# EAGLE board people_counter_v2 (EAGLE 9.6.2)
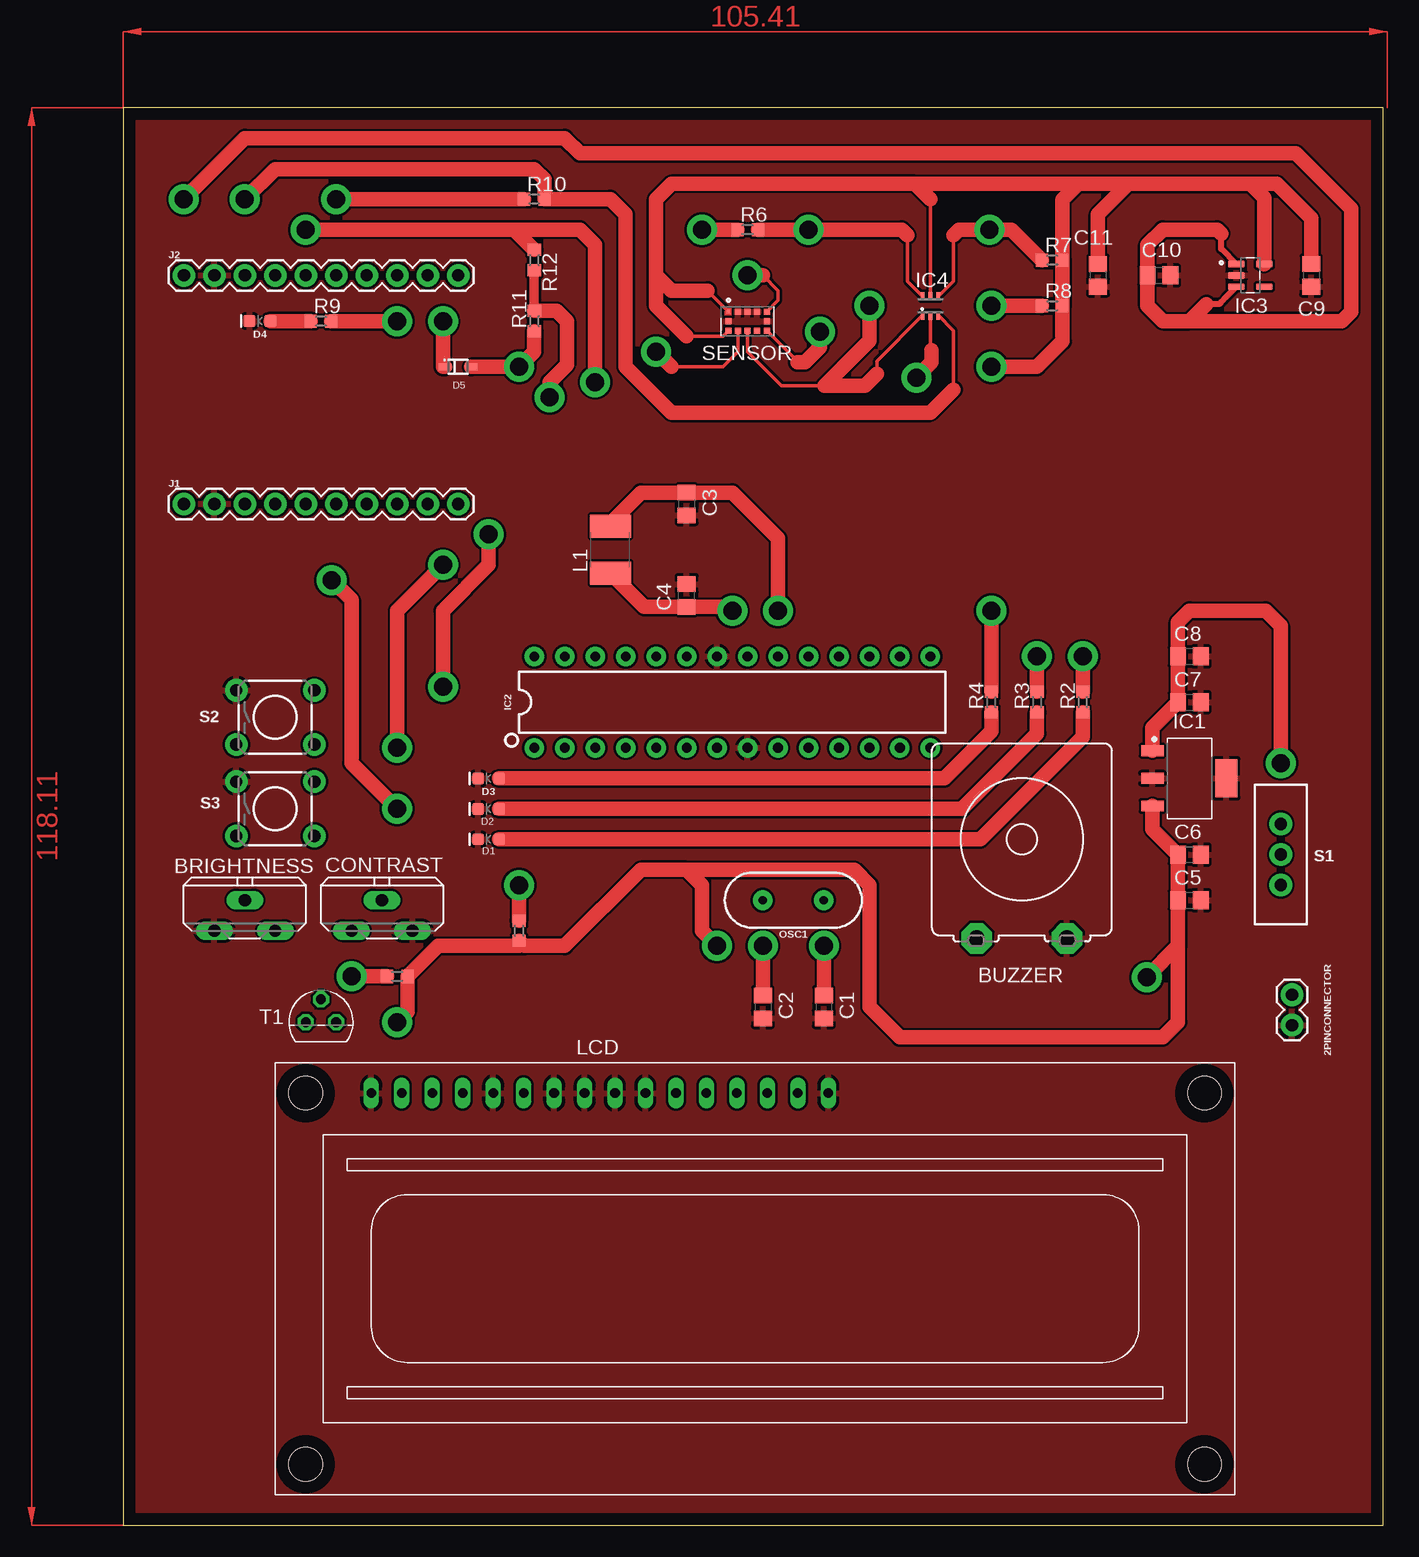
[diagram p0: board, top side]
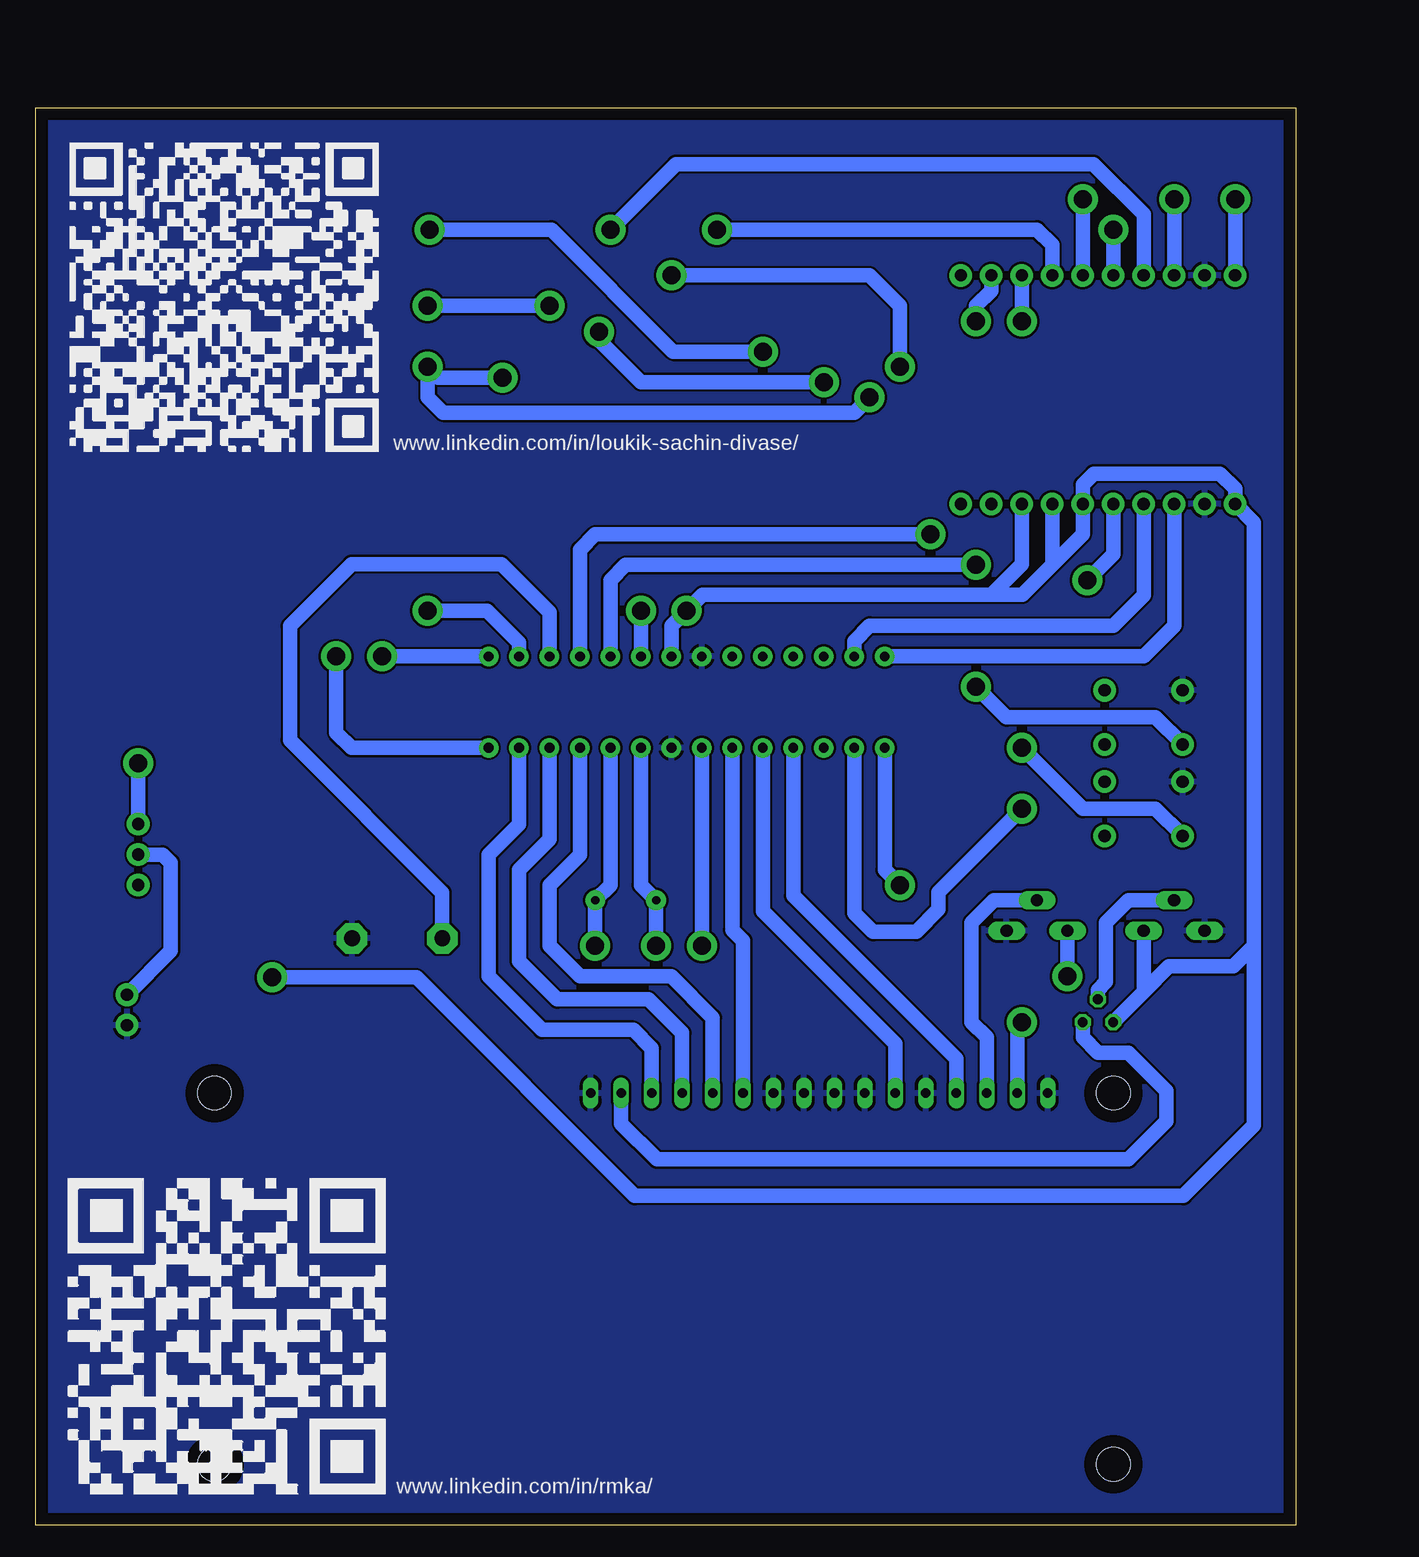
[diagram p1: board, bottom side, seen from below]

Size 105.08 x 118.1 mm. Coordinates in mm from the lower left corner, seen from the top.
Outline: 0,0 105.08,0 105.08,118.1 0,118.1 0,0
Copper layers (1*16): Top 0.035mm / dielectric 1.5mm / Bottom 0.035mm
Design rules "default": minimum track width 6mil, minimum drill 0.35mm, track to track 6mil, track to pad 6mil, pad to pad 6mil, via to via 6mil, smd to smd 6mil, copper to edge 40mil, drill to drill 6mil, minimum pad ring 10mil, minimum via ring 8mil, stop-mask expansion 4mil, vias tented up to drill 0mil, thermal gap 10mil
Net classes: 0 default: clearance 0.5 mm; 1 New Class: clearance 0.2 mm

## Footprints (pad centres in the part's own frame; a part is rotated, then mirrored left to right if it is on the bottom)
1X02 = drill 1.016 pad 1.88: 1 0,0; 2 2.54,0
PT-10S = drill 1.016 long: A -2.54,-1.27; E 2.54,-1.27; S 0,1.27
B/C11L = drill 1.321 pad 2.54 octagon: 1 -3.759,-8.255; 2 3.759,-8.255
C0805 = smd 1.3 x 1.5: 1 -0.95,0; 2 0.95,0
LED-0603 = smd 1 x 1: A -0.877,0; C 0.877,0
SOD323F = smd 1 x 0.6: A 1.1,0; C -1.1,0
SOT230P700X170-4 = smd 1.86 x 0.898: 1 -3.075,2.3; 2 -3.075,0; 3 -3.075,-2.3 | smd 1.86 x 3.189: 4 3.075,0
DIP28 = drill 0.813 pad 1.626: 1 -16.51,-3.81; 2 -13.97,-3.81; 3 -11.43,-3.81; 4 -8.89,-3.81; 5 -6.35,-3.81; 6 -3.81,-3.81; 7 -1.27,-3.81; 8 1.27,-3.81; 9 3.81,-3.81; 10 6.35,-3.81; 11 8.89,-3.81; 12 11.43,-3.81; 13 13.97,-3.81; 14 16.51,-3.81; 15 16.51,3.81; 16 13.97,3.81; 17 11.43,3.81; 18 8.89,3.81; 19 6.35,3.81; 20 3.81,3.81; 21 1.27,3.81; 22 -1.27,3.81; 23 -3.81,3.81; 24 -6.35,3.81; 25 -8.89,3.81; 26 -11.43,3.81; 27 -13.97,3.81; 28 -16.51,3.81
SOT95P280X145-5N = smd 1.39 x 0.58: 1 -1.165,0.95; 2 -1.165,0; 3 -1.165,-0.95; 4 1.165,-0.95; 5 1.165,0.95
SOT363 = smd 0.3 x 0.7: D1 -0.62,-0.8; D2 -1.92,0.8; G1 -1.27,0.8; G2 -1.27,-0.8; S1 -0.62,0.8; S2 -1.92,-0.8
1X10 = drill 1.016 pad 1.88: 1 0,0; 2 2.54,0; 3 5.08,0; 4 7.62,0; 5 10.16,0; 6 12.7,0; 7 15.24,0; 8 17.78,0; 9 20.32,0; 10 22.86,0
L1812 = smd 1.9 x 3.4: 1 -1.95,0; 2 1.95,0
HC49US = drill 0.7 pad 1.651: 1 -2.54,0; 2 2.54,0
R0603 = smd 1 x 1.1: 1 -0.85,0; 2 0.85,0
SWITCH_SPDT_PTH_11.6X4.0MM = drill 1.016 pad 1.88: 1 0,2.54; 2 0,0; 3 0,-2.54
TACTILE_SWITCH_PTH_6.0MM = drill 1.016 pad 1.88: 1 -3.251,2.261; 2 3.251,2.261; 3 -3.251,-2.261; 4 3.251,-2.261
XCDR_VL53L4CXV0DH/1 = smd 0.25 x 0.25: 1 1.6,-0.8 | smd 0.5 x 0.5: 2 0.8,-0.8; 3 0,-0.8; 4 -0.8,-0.8; 5 -1.6,-0.8; 6 -1.6,0; 7 -1.6,0.8; 8 -0.8,0.8; 9 0,0.8; 10 0.8,0.8; 11 1.6,0.8; 12 1.6,0
TO92 = drill 0.813 octagon: 1 1.27,0; 2 0,1.905; 3 -1.27,0
LCD1602 = drill 0.8 long: 1 8,33.46; 2 10.54,33.46; 3 13.08,33.46; 4 15.62,33.46; 5 18.16,33.46; 6 20.7,33.46; 7 23.24,33.46; 8 25.78,33.46; 9 28.32,33.46; 10 30.86,33.46; 11 33.4,33.46; 12 35.94,33.46; 13 38.48,33.46; 14 41.02,33.46; 15 43.56,33.46; 16 46.1,33.46 | hole 2.8: 2.54,2.54; 2.54,33.46; 77.46,33.46; 77.46,2.54

## Placement (x,y rotation side)
2PINCONNECTOR  [1X02]  97.45,44.19 270 top
BRIGHTNESS  [PT-10S]  10.16,50.8 0 top
BUZZER  B/C11L  [B/C11L]  74.93,57.15 0 top
C1  22pF  [C0805]  58.42,43.18 270 top
C2  22pF  [C0805]  53.34,43.18 270 top
C3  100nF  [C0805]  46.99,85.09 270 top
C4  100nF  [C0805]  46.99,77.47 90 top
C5  100nF  [C0805]  88.9,52.07 0 top
C6  220µF  [C0805]  88.9,55.88 0 top
C7  100nF  [C0805]  88.9,68.58 0 top
C8  220µF  [C0805]  88.9,72.39 0 top
C9  0.1µF  [C0805]  99.06,104.14 270 top
C10  10µF  [C0805]  86.36,104.14 0 top
C11  10µF  [C0805]  81.28,104.14 270 top
CONTRAST  [PT-10S]  21.59,50.8 0 top
D1  Red  [LED-0603]  30.48,57.15 180 top
D2  Yellow  [LED-0603]  30.48,59.69 180 top
D3  Green  [LED-0603]  30.48,62.23 180 top
D4  Green  [LED-0603]  11.43,100.33 180 top
D5  1N4148WS  [SOD323F]  27.94,96.52 0 top
IC1  7805  [SOT230P700X170-4]  88.9,62.23 0 top
IC2  328P  [DIP28]  50.8,68.58 0 top
IC3  MIC5504-2.8YM5-TR  [SOT95P280X145-5N]  93.98,104.14 0 top
IC4  DMN63D8LDW-7  [SOT363]  68.58,101.6 0 top
J1  [1X10]  5.08,85.09 0 top
J2  [1X10]  5.08,104.14 0 top
L1  10µH  [L1812]  40.64,81.28 90 top
OSC1  16MHz  [HC49US]  55.88,52.07 180 top
R1  10k  [R0603]  33.02,49.53 270 top
R2  220  [R0603]  80.01,68.58 90 top
R3  220  [R0603]  76.2,68.58 90 top
R4  220  [R0603]  72.39,68.58 90 top
R5  10k  [R0603]  22.86,45.72 180 top
R6  10k  [R0603]  52.07,107.95 0 top
R7  10k  [R0603]  77.47,105.41 0 top
R8  10k  [R0603]  77.47,101.6 0 top
R9  220  [R0603]  16.51,100.33 0 top
R10  10k  [R0603]  34.29,110.49 0 top
R11  10k  [R0603]  34.29,100.33 90 top
R12  10k  [R0603]  34.29,105.41 270 top
S1  [SWITCH_SPDT_PTH_11.6X4.0MM]  96.52,55.88 0 top
S2  MOMENTARY-SWITCH-SPST-PTH-6.0MM  [TACTILE_SWITCH_PTH_6.0MM]  12.7,67.31 0 top
S3  MOMENTARY-SWITCH-SPST-PTH-6.0MM  [TACTILE_SWITCH_PTH_6.0MM]  12.7,59.69 0 top
SENSOR  VL53L4CXV0DH/1  [XCDR_VL53L4CXV0DH/1]  52.07,100.33 180 top
T1  BC547  [TO92]  16.51,41.91 0 top
X1  [LCD1602]  12.7,2.54 0 top

## Library data of the parts
2PINCONNECTOR = SparkFun-Connectors
BRIGHTNESS CONTRAST = pot
BUZZER = buzzer; OC_FARNELL: unknown; OC_NEWARK: unknown
C1-C11 = rcl; SPICEPREFIX: C
D1 = SparkFun-LED; PROD_ID: DIO-16511
D2 = SparkFun-LED; PROD_ID: DIO-16514
D3 D4 = SparkFun-LED; PROD_ID: DIO-16512
D5 = _hhn_diodes_smd
IC1 = IC_Power-Management; CATEGORY: IC_Logic; DESCRIPTION: 5V Voltage Regulator; MANUFACTURER: Generic; MPN: Generic; SERIES: LM7805; SUB-CATEGORY: Voltage Regulator; TYPE: 5V
IC2 = SparkFun-IC-Microcontroller; PROD_ID: IC-09136
IC3 = MIC5504-2.8YM5-TR; AVAILABILITY: In Stock; CHECK_PRICES: https://www.snapeda.com/parts/MIC5504-2.8YM5-TR/Microchip/view-part/?ref=eda; DESCRIPTION: Linear Voltage Regulator IC Positive Fixed 1 Output 300mA SOT-23-5; MF: Microchip; MP: MIC5504-2.8YM5-TR; PACKAGE: SOT-23 Microchip; PRICE: None; SNAPEDA_LINK: https://www.snapeda.com/parts/MIC5504-2.8YM5-TR/Microchip/view-part/?ref=snap
IC4 = DMN63D8LDW-7; AVAILABILITY: In Stock; CHECK_PRICES: https://www.snapeda.com/parts/DMN63D8LDW-7/Diodes+Inc./view-part/?ref=eda; DESCRIPTION: Dual N-Ch Enhancement MOSFET SOT-363 | Diodes Inc DMN63D8LDW-7; MF: Diodes Inc.; MP: DMN63D8LDW-7; PACKAGE: SOT-363 Diodes Inc.; PRICE: None; SNAPEDA_LINK: https://www.snapeda.com/parts/DMN63D8LDW-7/Diodes+Inc./view-part/?ref=snap
J1 J2 = SparkFun-Connectors; PROD_ID: CONN-11563
L1 = rcl; SPICEPREFIX: L
OSC1 = SparkFun-Clocks; PROD_ID: XTAL-08181; SF_ID: COM-00536
R1-R12 = rcl; SPICEPREFIX: R
S1 = SparkFun-Switches; PROD_ID: SWCH-08261; SF_SKU: COM-00102
S2 S3 = SparkFun-Switches; PROD_ID: SWCH-08441; SF_SKU: COM-00097
SENSOR = VL53L4CXV0DH_1; AVAILABILITY: In Stock; CHECK_PRICES: https://www.snapeda.com/parts/VL53L4CXV0DH/1/STMicroelectronics/view-part/?ref=eda; DESCRIPTION: Proximity Sensor Time of Flight(TOF) 600cm 2.6V to 3.5VDC 12-Pin LGA T/R; MF: STMicroelectronics; MP: VL53L4CXV0DH/1; PACKAGE: None; PRICE: None; SNAPEDA_LINK: https://www.snapeda.com/parts/VL53L4CXV0DH/1/STMicroelectronics/view-part/?ref=snap
T1 = transistor
X1 = adafruit

## Nets
2.8V [New Class]: C9.1 C11.1 IC3.5 IC4.G1 IC4.G2 R7.2 R8.2 R11.2 R12.2 SENSOR.1 SENSOR.11
9V: C7.1 C8.1 IC1.1 S1.1
AVCC: C3.1 IC2.20 L1.2
DB4: IC2.6 X1.11
DB5: IC2.11 X1.12
DB6: IC2.12 X1.13
DB7: IC2.13 X1.14
E: IC2.5 X1.6
GREEN: D3.A R4.1
N$1: J2.6 R10.1
N$2: D4.A R9.1
N$3: D5.C J2.9
N$4: 2PINCONNECTOR.1 S1.2
N$5: IC2.2 J1.5
N$7 [New Class]: D5.A R11.1 SENSOR.5
N$8: CONTRAST.A R5.2
N$10 [New Class]: J2.5 R12.1 SENSOR.7
N$11 [New Class]: IC4.D1 J2.3 R10.2
N$12 [New Class]: IC4.D2 J2.4 R6.2
N$13: BRIGHTNESS.S T1.2
N$14: J2.8 R9.2
N$15: J2.7 R6.1
N$16 [New Class]: C10.1 IC3.1 IC3.3 J2.1
N$23: T1.1 X1.15
PB0: IC2.14 R2.2
PB1: IC2.15 R3.2
PB2: IC2.16 R4.2
PB3: BUZZER.1 IC2.17
PB4: IC2.18 S2.3
PB5: IC2.19 S3.3
RED: D1.A R2.1
RESET: IC2.1 R1.1
RS: IC2.4 X1.4
SCL_3V [New Class]: IC4.S1 R7.1 SENSOR.10
SCL_5V: IC2.28 J1.3
SDA_3V [New Class]: IC4.S2 R8.1 SENSOR.9
SDA_5V: IC2.27 J1.4
VCC: BRIGHTNESS.E C4.1 C5.1 C6.1 IC1.3 IC2.7 IC2.21 J1.1 J1.6 J1.7 J1.8 L1.1 R1.2 R5.1 T1.3 X1.2
VO: CONTRAST.S X1.3
VSS [New Class]: 2PINCONNECTOR.2 BRIGHTNESS.A BUZZER.2 C1.2 C2.2 C3.2 C4.2 C5.2 C6.2 C7.2 C8.2 C9.2 C10.2 C11.2 CONTRAST.E D1.C D2.C D3.C D4.C IC1.2 IC1.4 IC2.8 IC2.22 IC3.2 J1.2 J2.2 S2.1 S3.1 SENSOR.2 SENSOR.3 SENSOR.4 SENSOR.6 SENSOR.12 X1.1 X1.5 X1.7 X1.8 X1.9 X1.10 X1.16
XTAL1: C2.1 IC2.9 OSC1.2
XTAL2: C1.1 IC2.10 OSC1.1
YELLOW: D2.A R3.1

## Tracks (layer width: path | path; a pad name or v marks a point on that pad's centre or on a via)
2.8V  (via drill 1.5 pad 2.5)
  Top 0.3: 67.31,110.49 IC4.G1 | 67.41,97.88 67.31,97.79 IC4.G2 | 48.73,102.87 SENSOR.1 | SENSOR.11 50,99.06 46.99,99.06
  Top 0.8: R12.2 R11.2
  Top 1.2: C9.1 99.06,108.9 96.2,111.76 93.98,111.76 | 83.82,111.76 93.98,111.76 | C11.1 81.28,109.22 83.82,111.76 | 66.04,111.76 67.31,110.49 | 66.04,111.76 45.72,111.76 44.45,110.49 44.45,104.14 | 44.45,104.14 44.45,101.6 46.99,99.06 | 66.04,111.76 79.63,111.76 | 79.63,111.76 83.82,111.76 | 79.63,111.76 78.32,110.45 R7.2 R8.2 78.32,98.64 76.2,96.52 v72.39,96.52 | 93.98,111.76 95.15,110.59 IC3.5 | 44.45,104.14 45.72,102.87 48.73,102.87 | 67.41,97.88 67.41,96.9 v66.14,95.63 | v35.56,93.98 35.56,95.25 37.01,96.7 37.01,100.33 36.16,101.18 R11.2
  Bottom 1.2: v66.14,95.63 71.5,95.63 v72.39,96.52 72.39,93.98 71.12,92.71 36.83,92.71 v35.56,93.98
9V  (via drill 1.5 pad 2.5)
  Top 1.2: IC1.1 85.83,66.45 C7.1 C8.1 87.95,75.25 88.9,76.2 95.25,76.2 96.52,74.93 v96.52,63.5
  Bottom 1.2: v96.52,63.5 S1.1
AVCC  (via drill 1.5 pad 2.5)
  Top 1.2: L1.2 40.64,83.5 43.18,86.04 C3.1 50.8,86.04 54.61,82.23 v54.61,76.2
  Bottom 1.2: v54.61,76.2 IC2.20
DB4
  Bottom 1.2: IC2.6 46.99,49.59 46.1,48.7 X1.11
DB5
  Bottom 1.2: X1.12 48.64,42.29 52.07,45.72 59.69,45.72 62.23,48.26 62.23,53.34 59.69,55.88 IC2.11
DB6
  Bottom 1.2: X1.13 51.18,41.02 53.98,43.81 61.59,43.81 64.77,46.99 64.77,54.61 62.23,57.15 IC2.12
DB7
  Bottom 1.2: X1.14 53.72,39.75 55.24,41.27 62.87,41.27 67.31,45.72 67.31,55.88 64.77,58.42 IC2.13
E
  Bottom 1.2: IC2.5 44.45,51.17 33.4,40.12 X1.6
GREEN
  Top 1.2: D3.A 68.46,62.23 72.39,66.16 R4.1
N$1  (via drill 1.5 pad 2.5)
  Top 1.2: R10.1 v17.78,110.49
  Bottom 1.2: v17.78,110.49 J2.6
N$2
  Top 1.2: R9.1 D4.A
N$3  (via drill 1.5 pad 2.5)
  Top 1.2: D5.C 26.67,96.52 v26.67,100.33
  Bottom 1.2: v26.67,100.33 26.67,101.6 25.4,102.87 J2.9
N$4
  Bottom 1.2: S1.2 94.48,55.88 93.8,55.2 93.8,47.84 2PINCONNECTOR.1
N$5  (via drill 1.5 pad 2.5)
  Top 1.2: v17.4,78.74 19.05,77.09 19.05,63.5 v22.86,59.69
  Bottom 1.2: v17.4,78.74 15.24,80.9 J1.5 | v22.86,59.69 29.8,52.75 29.8,51.3 31.66,49.44 35.27,49.44 36.83,51.01 IC2.2
N$7  (via drill 1.5 pad 2.5)
  Top 0.3: 53.34,104.14 54.61,102.87 54.61,102.07 SENSOR.5
  Top 1.2: R11.1 34.29,97.79 v33.02,96.52 D5.A | 53.34,104.14 v52.07,104.14
  Bottom 1.2: v52.07,104.14 35.56,104.14 33.02,101.6 v33.02,96.52
N$8  (via drill 1.5 pad 2.5)
  Top 1.2: R5.2 v19.05,45.72
  Bottom 1.2: CONTRAST.A v19.05,45.72
N$10  (via drill 1.5 pad 2.5)
  Top 0.3: SENSOR.7 56.21,96.99 56.21,96.9
  Top 1.2: 32.6,107.95 38.1,107.95 39.37,106.68 v39.37,95.25 | 32.6,107.95 v15.24,107.95 | v58.12,99.44 58.12,98.17 56.84,96.9 56.21,96.9 | R12.1 32.6,107.95
  Bottom 1.2: J2.5 v15.24,107.95 | v39.37,95.25 54.61,95.25 58.12,98.75 v58.12,99.44
N$11  (via drill 1.5 pad 2.5)
  Top 0.3: IC4.D1 69.23,99.53 69.23,94.63
  Top 1.2: 69.23,94.63 67.31,92.71 45.72,92.71 41.91,96.52 41.91,109.22 40.64,110.49 R10.2 35.14,112.15 34.29,113 12.67,113 v10.16,110.49
  Bottom 1.2: J2.3 v10.16,110.49
N$12  (via drill 1.5 pad 2.5)
  Top 0.3: IC4.D2 65.39,103.67 65.39,107.48
  Top 1.2: R6.2 v57.15,107.95 64.92,107.95 65.39,107.48
  Bottom 1.2: J2.4 12.7,109.22 16.89,113.41 51.69,113.41 v57.15,107.95
N$13
  Bottom 1.2: BRIGHTNESS.S 13.97,52.07 15.83,50.21 15.83,45.26 16.51,44.58 T1.2
N$14  (via drill 1.5 pad 2.5)
  Top 1.2: R9.2 v22.86,100.33
  Bottom 1.2: J2.8 v22.86,100.33
N$15  (via drill 1.5 pad 2.5)
  Top 1.2: R6.1 v48.26,107.95
  Bottom 1.2: v48.26,107.95 21.59,107.95 20.32,106.68 J2.7
N$16  (via drill 1.5 pad 2.5)
  Top 0.5: IC3.3 91.97,102.34 91.55,101.92 91.38,101.75 90.32,101.75 | IC3.1 91.55,106.36 91.55,107.63
  Top 1.2: v5.08,110.49 10.16,115.57 36.83,115.57 38.1,114.3 97.79,114.3 102.39,109.7 102.39,101.12 101.6,100.33 88.9,100.33 | 91.55,107.63 91.23,107.95 86.68,107.95 85.41,106.68 C10.1 85.41,101.6 86.68,100.33 88.9,100.33 | 90.32,101.75 88.9,100.33
  Bottom 1.2: J2.1 v5.08,110.49
N$23
  Bottom 1.2: T1.1 17.78,40.64 16.51,39.37 13.97,39.37 10.8,36.2 10.8,33.66 13.97,30.48 53.28,30.48 56.26,33.46 X1.15
PB0  (via drill 1.5 pad 2.5)
  Top 1.2: v80.01,72.39 R2.2
  Bottom 1.2: v80.01,72.39 80.01,66.04 78.74,64.77 IC2.14
PB1  (via drill 1.5 pad 2.5)
  Top 1.2: R3.2 v76.2,72.39
  Bottom 1.2: v76.2,72.39 IC2.15
PB2  (via drill 1.5 pad 2.5)
  Top 1.2: R4.2 v72.39,76.2
  Bottom 1.2: v72.39,76.2 67.43,76.2 64.77,73.54 IC2.16
PB3
  Bottom 1.2: BUZZER.1 71.17,52.7 83.87,65.41 83.87,74.94 78.74,80.07 66.23,80.07 62.23,76.07 IC2.17
PB4  (via drill 1.5 pad 2.5)
  Top 1.2: v30.48,82.55 30.48,80.01 26.67,76.2 v26.67,69.85
  Bottom 1.2: v30.48,82.55 58.42,82.55 59.69,81.28 IC2.18 | S2.3 11.71,67.31 24.13,67.31 v26.67,69.85
PB5  (via drill 1.5 pad 2.5)
  Top 1.2: v26.67,80.01 22.86,76.2 v22.86,64.77
  Bottom 1.2: IC2.19 57.15,78.74 55.88,80.01 v26.67,80.01 | S3.3 11.71,59.69 17.78,59.69 v22.86,64.77
RED
  Top 1.2: D1.A 71.46,57.15 80.01,65.7 R2.1
RESET  (via drill 1.5 pad 2.5)
  Top 1.2: v33.02,53.34 R1.1
  Bottom 1.2: IC2.1 34.29,54.61 v33.02,53.34
RS
  Bottom 1.2: X1.4 28.32,38.85 41.91,52.44 IC2.4
SCL_3V  (via drill 1.5 pad 2.5)
  Top 0.3: 69.23,107.48 69.23,103.67 IC4.S1 | 45.72,96.52 50,96.52 51.27,97.79 SENSOR.10
  Top 1.2: R7.1 74.08,107.95 v72.24,107.95 69.7,107.95 69.23,107.48 | 45.72,96.52 v44.45,97.79
  Bottom 1.2: v72.24,107.95 62.08,107.95 51.92,97.79 v44.45,97.79
SCL_5V
  Bottom 1.2: J1.3 10.16,74.93 12.7,72.39 IC2.28
SDA_3V  (via drill 1.5 pad 2.5)
  Top 0.3: IC4.S2 62.85,96.99 62.85,95.95 | 58.49,94.95 54.91,94.95 52.07,97.79 SENSOR.9
  Top 1.2: R8.1 v72.39,101.6 | v62.23,101.6 62.23,98.68 58.49,94.95 61.85,94.95 62.85,95.95
  Bottom 1.2: v72.39,101.6 v62.23,101.6
SDA_5V
  Bottom 0.8: 35.56,74.93 35.56,74.96
  Bottom 1.2: J1.4 12.7,77.47 15.21,74.96 35.56,74.96 | IC2.27 36.83,73.66 35.56,74.93
VCC  (via drill 1.5 pad 2.5)
  Top 1.2: L1.1 43.45,76.52 C4.1 50.48,76.52 v50.8,76.2 | 87.95,48.26 C5.1 C6.1 85.83,58.01 IC1.3 | 46.99,54.61 60.96,54.61 62.23,53.34 62.23,43.18 64.77,40.64 86.68,40.64 87.95,41.91 87.95,48.26 | 46.99,54.61 43.18,54.61 36.83,48.26 33.44,48.26 R1.2 33.02,48.26 26.25,48.26 25.66,47.67 R5.1 23.71,42.76 v22.86,41.91 | v49.53,48.26 48.26,49.53 48.26,53.34 46.99,54.61 | 87.95,48.26 85.34,45.65 v85.34,45.64
  Bottom 1.2: IC2.21 52.07,74.93 v50.8,76.2 49.47,77.53 25.4,77.53 | IC2.7 v49.53,48.26 | 3.52,48.26 3.52,33.31 9.39,27.44 55.13,27.44 73.32,45.64 v85.34,45.64 | 3.52,48.26 3.52,83.53 J1.1 5.08,86.36 6.35,87.63 16.86,87.63 17.78,86.7 J1.6 17.78,82.55 20.32,80.01 | 25.4,77.53 22.8,77.53 20.32,80.01 | J1.7 20.32,80.01 | T1.3 12.7,44.45 | 12.7,44.45 BRIGHTNESS.E | v22.86,41.91 23.24,41.53 X1.2 | 25.4,77.53 22.86,80.07 J1.8 | 12.7,44.45 10.58,46.57 5.21,46.57 3.52,48.26
VO
  Bottom 1.2: CONTRAST.S 25.19,52.07 27.05,50.21 27.05,41.91 25.78,40.64 X1.3
VSS
  pour Top: 0,118.11 105.41,118.11 105.41,0 0,0
  pour Bottom: 0,118.11 105.41,118.11 105.41,0 0,0
XTAL1  (via drill 1.5 pad 2.5)
  Top 1.2: v53.34,48.26 C2.1
  Bottom 1.2: IC2.9 54.61,53.34 OSC1.2 v53.34,48.26
XTAL2  (via drill 1.5 pad 2.5)
  Top 1.2: v58.42,48.26 C1.1
  Bottom 1.2: IC2.10 57.15,53.34 OSC1.1 v58.42,48.26
YELLOW
  Top 1.2: D2.A 69.94,59.69 76.2,65.95 R3.1
(copper drawn outside any net)
  shapes: Top area x2

## Text on the board
bPlace: www.linkedin.com/in/loukik-sachin-divase/ | www.linkedin.com/in/rmka/
tNames: IC3 | D2 | D1 | BRIGHTNESS | CONTRAST | T1 | LCD